# Altium PCB vcsample.pcbdoc
Units mm, origin at the board's own origin, x right, y up, seen from the top; angles counter-clockwise.
Board outline 65.8 x 69.04 mm, 2 copper layers (Top Layer, Bottom Layer); 22 components, 11 nets, 60 pads, 9 vias.
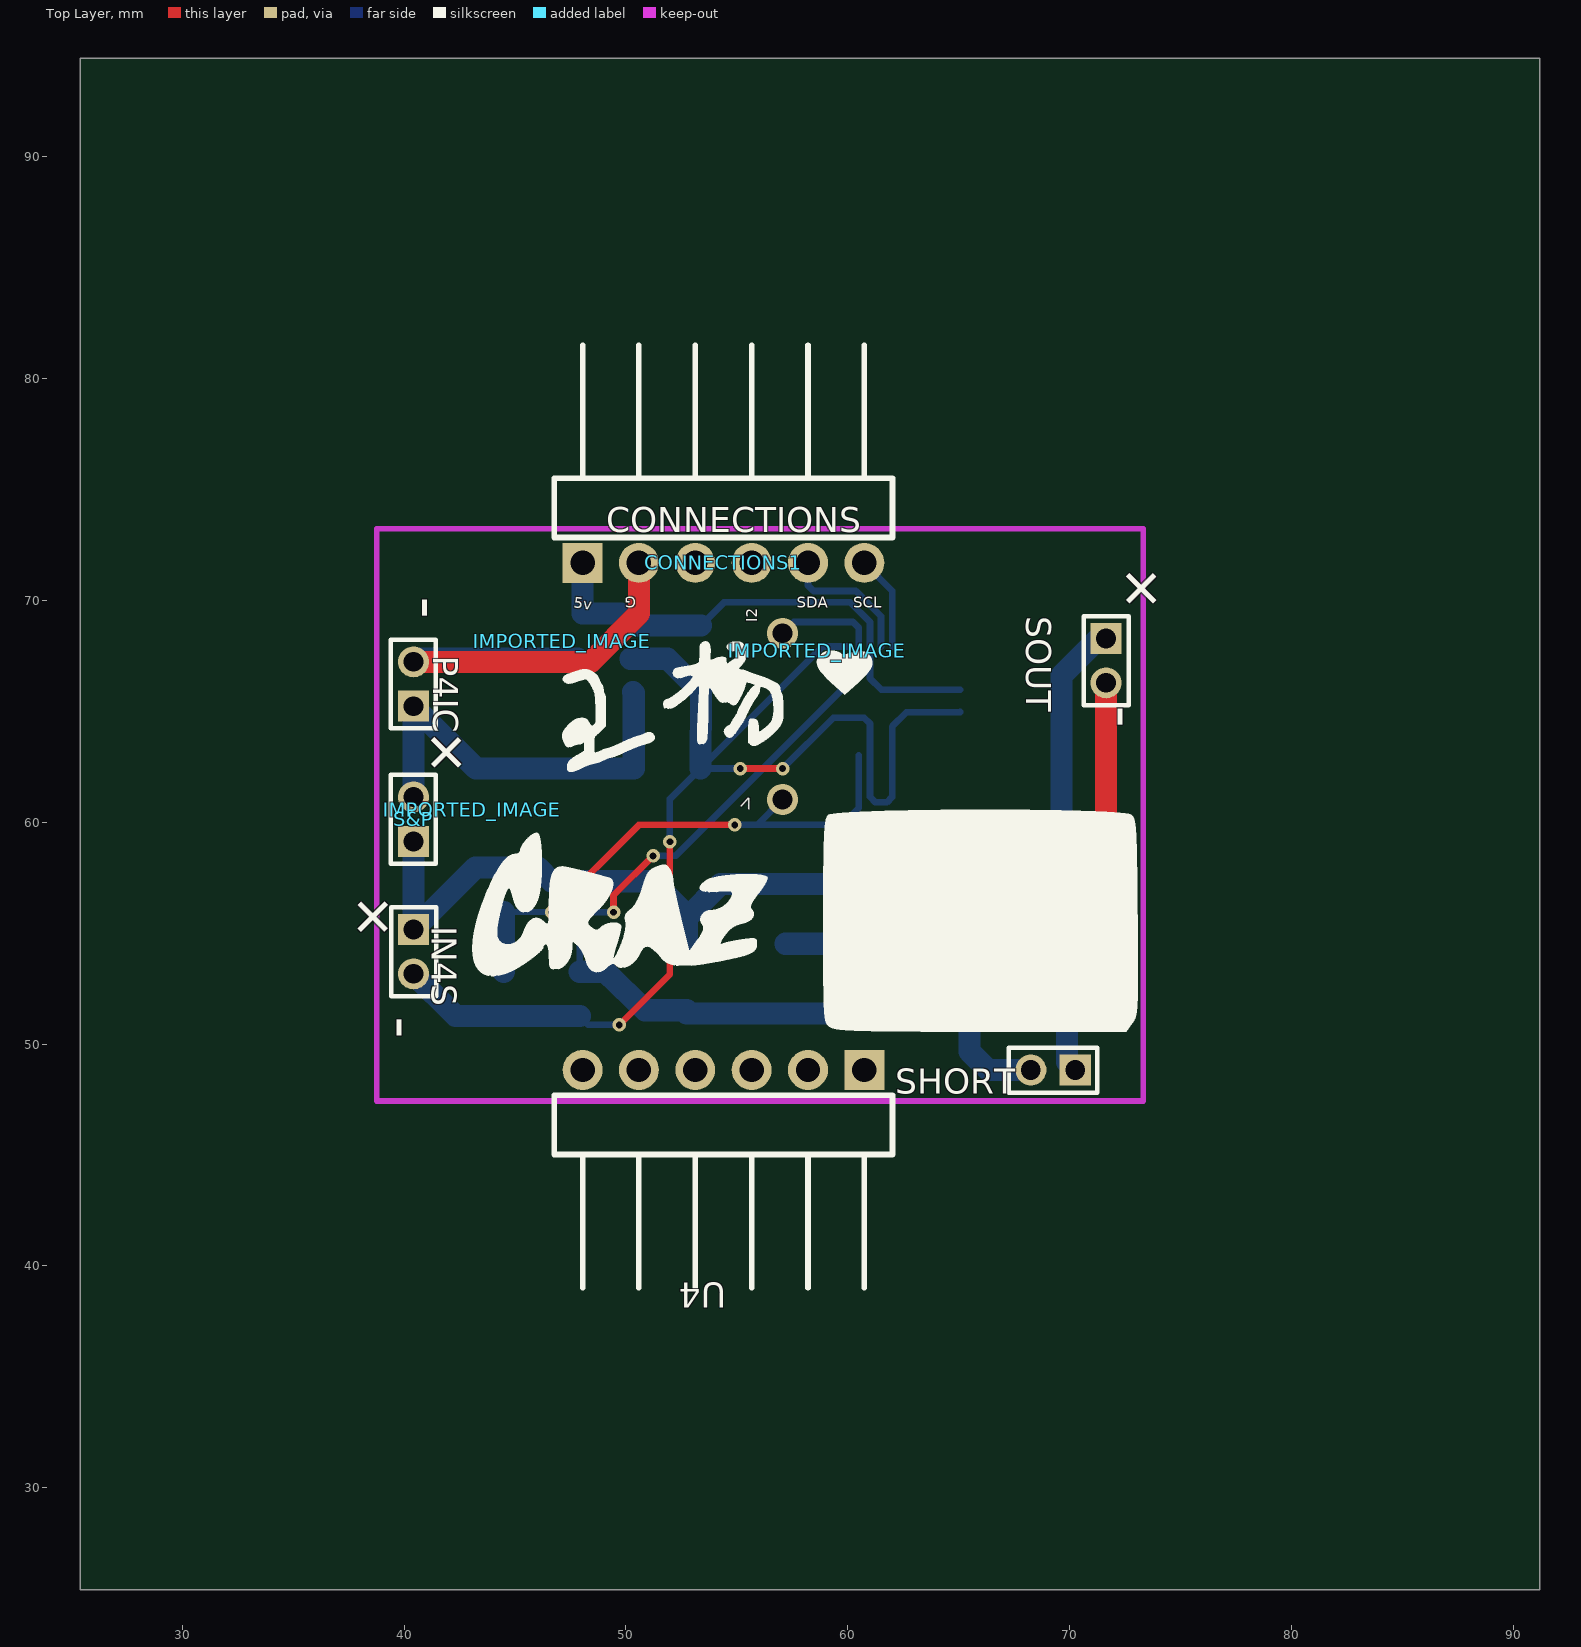
[diagram p0: Top Layer view]
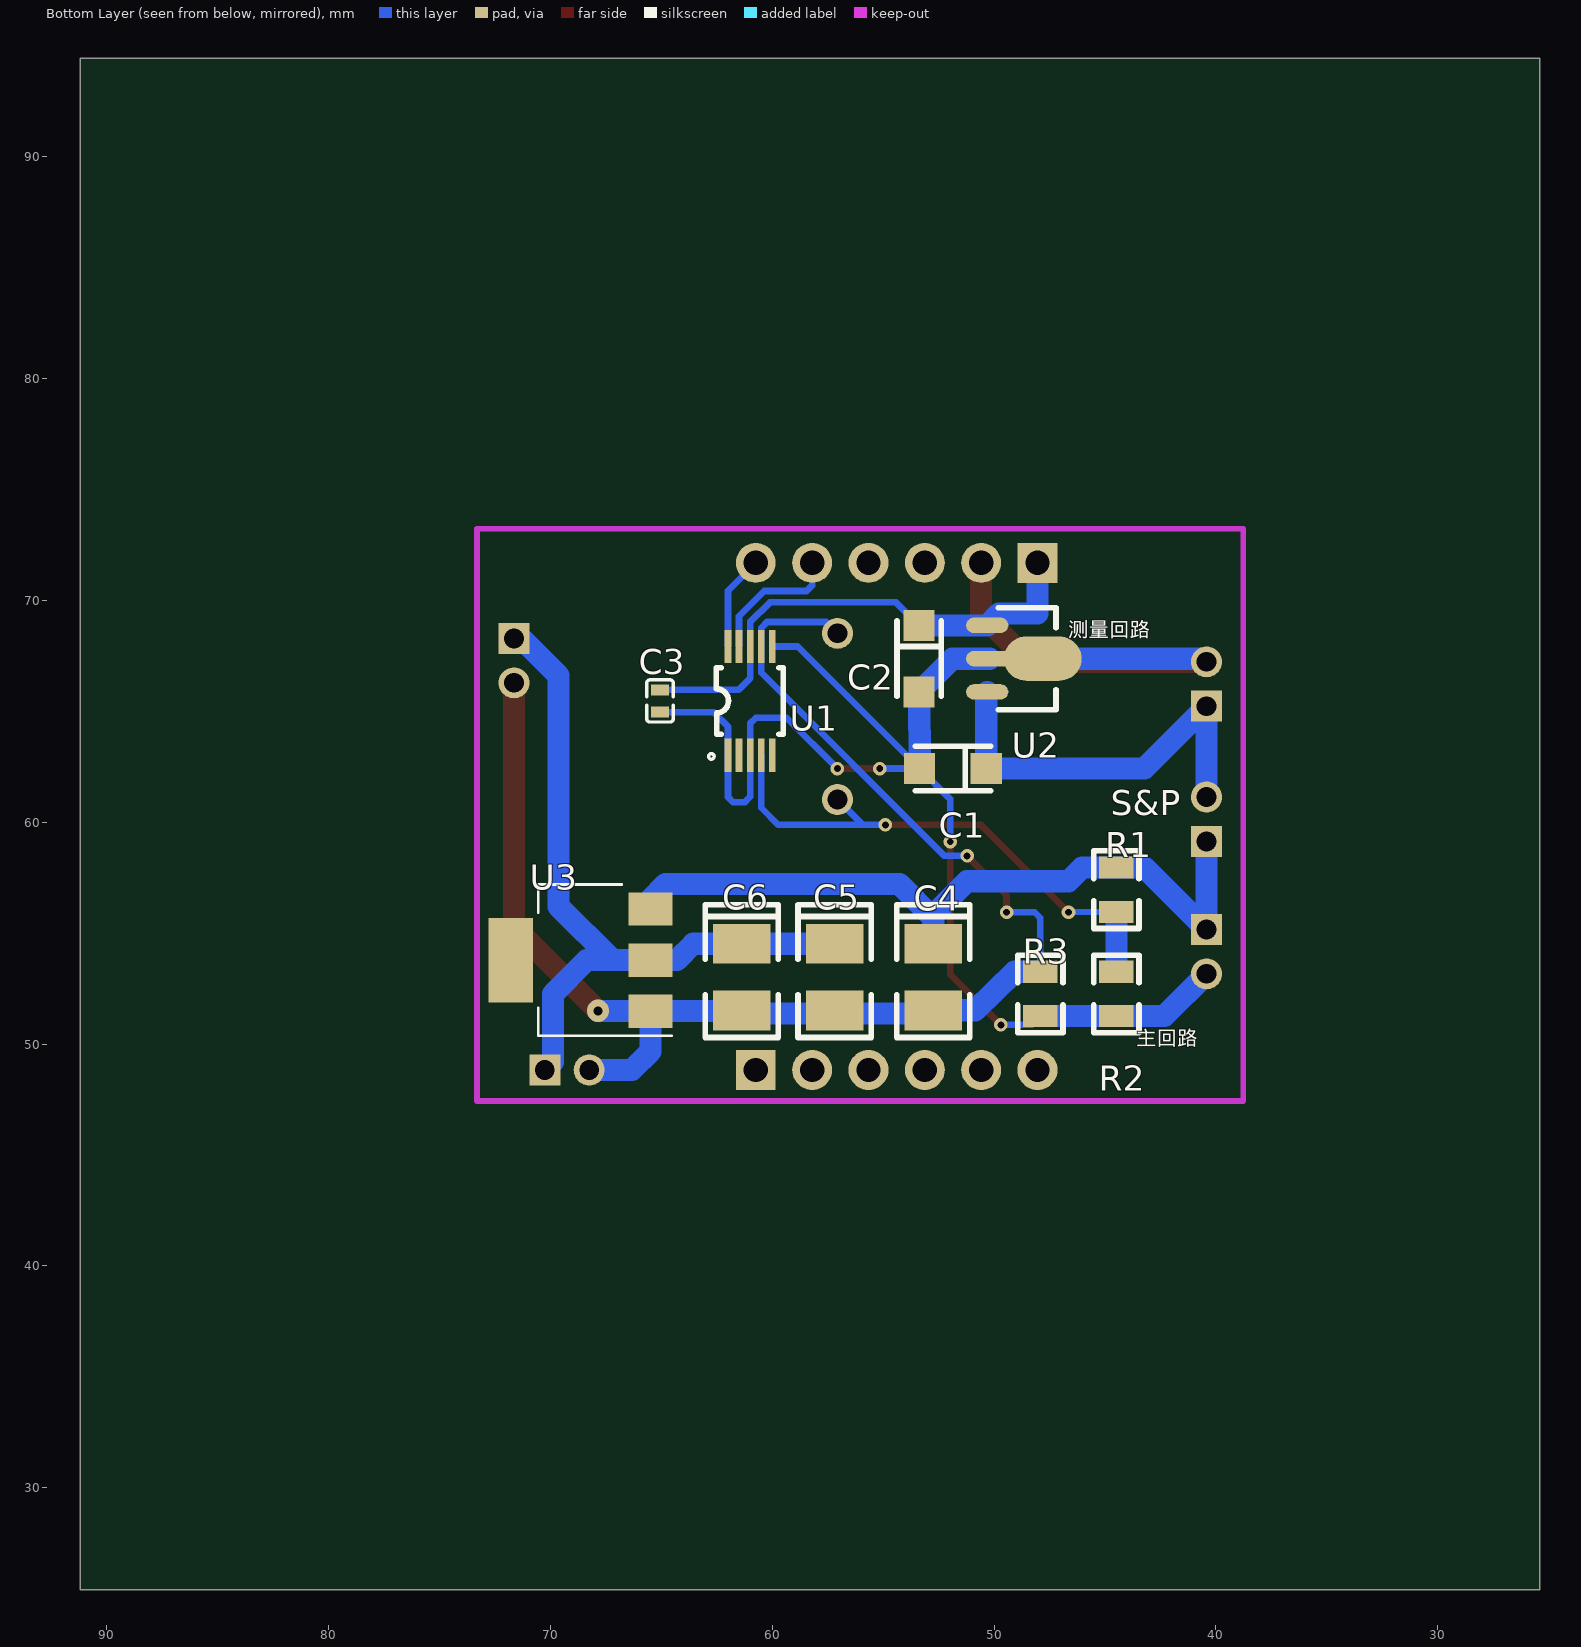
[diagram p1: Bottom Layer view, seen from below]

## Layer stack, top to bottom
Top Layer: signal copper (thickness not stored)
Dielectric: dielectric 0.32, FR-4, Dk 4.8
Bottom Layer: signal copper (thickness not stored)

## Board outline
91.2,25.4 25.4,25.4 25.4,94.441 91.2,94.441

## Components (designator, comment, footprint, x,y, rotation, side; value= is the part's Value field where it differs from the comment)
C1 "1uF" CAP-SMD_L3.2-W1.6-R-RD 51.856,62.42 r0 bottom
C2 "1uF" CAP-SMD_L3.2-W1.6-R-RD 53.38,67.373 r270 bottom
C3 "100pF" C0402 65.064,65.468 r90 bottom
C4 "10uF" CAP-SMD_L3.5-W2.8-R-RD 52.745,53.023 r270 bottom
C5 "10uF" CAP-SMD_L3.5-W2.8-R-RD 57.19,53.023 r270 bottom
C6 "10uF" CAP-SMD_L3.5-W2.8-R-RD 61.381,53.023 r270 bottom
CONNECTIONS1 "connections" HDR-TH_6P-P2.54-H-W10.3 54.396,71.691 r0 top
IMPORTED_IMAGE "IMPORTED_IMAGE" IMPORTED_IMAGE 43.079,60.562 r0 top
IMPORTED_IMAGE "IMPORTED_IMAGE" IMPORTED_IMAGE 47.131,68.153 r0 top
IMPORTED_IMAGE "IMPORTED_IMAGE" IMPORTED_IMAGE 58.625,67.737 r0 top
IN4S "Input" HDR-TH_2P-P2.00-V 40.426,54.165 r270 top
P4IC "Input2" HDR-TH_2P-P2.00-V 40.426,66.23 r90 top
R1 "30kΩ" R0805 44.49,56.959 r90 bottom
R2 "30kΩ" R0805 44.49,52.261 r90 bottom
R3 "0.2" R0805 47.919,52.261 r270 bottom
S&P "Jump" HDR-TH_2P-P2.00-V 40.426,60.134 r90 top
SHORT "ShortCut" HDR-TH_2P-P2.00-V 69.255,48.831 r180 top
SOUT "OUtput" HDR-TH_2P-P2.00-V 71.642,67.285 r270 top
U1 "ADS1115IDGSR" MSOP-10_L3.0-W3.0-P0.50-LS5.0-BL 61,65.468 r0 bottom
U2 "SSP6201P502PR" SOT-89_L4.5-W2.5-P1.50-LS4.2-BR 49.062,67.373 r180 bottom
U3 "AMS1117-5.0" SOT-223 71.795,53.785 r180 bottom
U4 "HDR-TH_6P-P2.54-H-W10.3" HDR-TH_6P-P2.54-H-W10.3 54.396,48.831 r180 top

## Footprints (in the part's own frame and the unit in brackets; to place one, negate y for a bottom-side part, rotate by r counter-clockwise, add the part's x,y. Pads: shape width x height; smd on the part's side, far side on the other; paste and mask are expansions set on the pad)
C0402 [mm]
  rect 0.5x0.8 smd: 1(0.5,0) 2(-0.5,0)
  silkscreen extent -0.95,-0.6 0.95,0.6
CAP-SMD_L3.2-W1.6-R-RD [mm]
  rect 1.4x1.4 smd: 1(-1.5,0) 2(1.5,0)
  silkscreen extent -1.7,-1 1.7,1
CAP-SMD_L3.5-W2.8-R-RD [mm]
  rect 1.8x2.6 smd: 1(-1.501,0) 2(1.501,0)
  silkscreen extent -3.26,-1.65 2.73,1.65
HDR-TH_2P-P2.00-V [mm]
  rect 1.4x1.4 hole 0.889: 1(-1,0)
  round 1.4 hole 0.889: 2(1,0)
  silkscreen extent -2,-1 2.01,1.03
HDR-TH_6P-P2.54-H-W10.3 [mm]
  rect 1.8x1.8 hole 1.1: 1(-6.35,0)
  round 1.8 hole 1.1: 2(-3.81,0) 3(-1.27,0) 4(1.27,0) 5(3.81,0) 6(6.35,0)
  silkscreen extent -7.62,1.14 7.62,9.81
IMPORTED_IMAGE [mm]
  silkscreen extent 0,-10 30,0
MSOP-10_L3.0-W3.0-P0.50-LS5.0-BL [mil]
  rect 12x59.06 smd: 1(39.37,96.5) 2(19.68,96.5) 3(0,96.5) 4(-19.69,96.5) 5(-39.37,96.5) 6(-39.37,-96.5) 7(-19.69,-96.5) 8(0,-96.5) 9(19.68,-96.5) 10(39.37,-96.5)
  silkscreen extent -59,-59 74,103
R0805 [mm]
  rect 1x1.55 smd: 1(1,0) 2(-1,0)
  silkscreen extent -1.75,-1.02 1.75,1.02
SOT-89_L4.5-W2.5-P1.50-LS4.2-BR [mm]
  oval 1.9x0.7 smd: 1(-1.25,1.5) 3(-1.25,-1.5)
  oval 2.1x0.7 smd: 2(-1.151,0)
  oval 3.5x2 smd: 2(1.25,0)
  silkscreen extent -0.75,-2.3 1.85,2.3
SOT-223 [mm]
  rect 2x1.5 smd: 1(6.3,-2.3) 2(6.3,0) 3(6.3,2.3)
  rect 2x3.8 smd: 4(0,0)
  silkscreen extent 1.24,-3.41 7.25,3.41

## Free pads (board coordinates)
  round 1.4 hole 0.889: 1(57.063,61.023) 2(57.063,68.516)

## Via types
v1: diameter 0.61, hole 0.305, Top Layer to Bottom Layer, 8 vias
v2: diameter 1, hole 0.4, Top Layer to Bottom Layer, 1 vias

## Nets (pads, with @x,y where several pads share a name; then routed paths per layer and width w, separated by ;. In a path a pad name is that pad's centre, name@x,y a point inside that pad or via, vN(x,y) a via of type N, cw(c..) or ccw(c..) an arc to the next point about the centre after c; other vN are vias at no path point)
+5V: C2.1 C3.1 CONNECTIONS1.1 U1.8 U2.1 | length 23.1
  Bottom Layer w0.3: C2.1 54.419,69.913 60.111,69.913 61,69.025 U1.8 61,66.484 61.508,65.977 C3.1
  Bottom Layer w1: CONNECTIONS1.1 48.046,69.406 49.78,69.406 U2.1 C2.1
D1: CONNECTIONS1.6 U1.10 | length 4.3
  Bottom Layer w0.3: CONNECTIONS1.6 62,70.438 U1.10
D2: CONNECTIONS1.5 U1.9 | length 6.3
  Bottom Layer w0.3: CONNECTIONS1.5 58.206,70.675 58.46,70.421 60.365,70.421 61.5,69.287 U1.9
D3: CONNECTIONS1.4
D4: CONNECTIONS1.3
ISAMPLE2: C4.2 C5.2 C6.2 pad.2 R3.2 SHORT.2 SOUT.2 U1.7 U3.1 | length 67.7
  Top Layer w0.3: v1(49.443,55.944) 49.443,56.706 v1(51.221,58.483)
  Top Layer w1: v2(67.858,51.498) 71.642,55.283 SOUT.2
  Bottom Layer w0.3: R3.2 47.919,55.689 48.173,55.944 v1(49.443,55.944) ; v1(51.221,58.483) 52.237,58.483 60.5,66.746 U1.7 60.5,68.763 60.238,69.025 57.571,69.025 pad.2
  Bottom Layer w1: R3.2 49.078,53.26 50.863,51.521 C4.2 ; C4.2@52.745,51.371 C6.2@61.381,51.371 ; C6.2 61.418,51.485 U3.1 65.495,49.67 66.334,48.831 SHORT.2 ; U3.1@65.496,51.486 v2(67.858,51.498)
P2_1: C5.1 C6.1 SHORT.1 SOUT.1 U3.2 | length 35.5
  Bottom Layer w1: C5.1 C6.1 63.563,54.524 64.302,53.785 U3.2 ; SHORT.1 69.89,49.196 69.89,52.261 68.366,53.785 U3.2 ; SOUT.1 71.31,68.285 69.636,66.611 69.636,56.197 67.208,53.785 U3.2@65.496,53.785
TD: C1.2 C2.2 C3.2 CONNECTIONS1.2 IN4S.2 P4IC.2 R2.2 R3.1 U1.1 U1.3 U1.6 U2.2 | length 80
  Top Layer w0.3: v1(49.697,50.863) 51.983,53.149 v1(51.983,59.118) ; v1(55.158,62.42) v1(57.063,62.42)
  Top Layer w1: P4IC.2 48.411,67.23 50.586,69.406 CONNECTIONS1.2
  Bottom Layer w0.3: R3.1 48.315,50.863 49.087,50.863 v1(49.697,50.863) ; v1(51.983,59.118) 51.983,61.047 C1.2 ; v1(55.158,62.42) C1.2 ; v1(57.063,62.42) 59.349,64.706 60.746,64.706 61,64.453 U1.3 61,61.151 61.254,60.896 61.762,60.896 62,61.134 U1.1 62.001,64.31 62.651,64.96 C3.2 ; U1.6 58.855,67.919 C1.2
  Bottom Layer w1: IN4S.2 42.331,51.261 R2.2 R3.1 ; P4IC.2 40.569,67.374 U2.2@47.812,67.374 ; U2.2@50.212,67.374 51.878,67.374 C2.2 C1.2@53.357,62.42
TV: C4.1 IN4S.1 R1.1 S&P.1 U3.3 | length 34.9
  Bottom Layer w1: S&P.1 IN4S.1 43.22,57.959 R1.1 46.03,57.959 46.649,57.34 51.221,57.34 52.745,55.816 C4.1 52.745,55.689 54.269,57.213 64.81,57.213 65.495,56.528 U3.3
VCC: C1.1 P4IC.1 S&P.2 U2.3 | length 18.7
  Bottom Layer w1: S&P.2 P4IC.1 43.236,62.42 C1.1 50.356,65.829 U2.3
VSAMPLE: pad.1 R1.2 R2.1 U1.4 | length 25.7
  Top Layer w0.3: v1(46.649,55.944) 50.586,59.88 v1(54.904,59.88)
  Bottom Layer w0.3: R1.2 v1(46.649,55.944) ; pad.1 55.92,59.88 v1(54.904,59.88) 59.73,59.88 60.5,60.65 U1.4
  Bottom Layer w1: R2.1 R1.2
pads on no net: U1.2 U1.5 U3.4 U4.1 U4.2 U4.3 U4.4 U4.5 U4.6

## Silkscreen, mask and mechanical layers (free items; w line width, h text height)
Top Overlay:
  text "CONNECTIONS" at 49.123,73.068 h1.14
  text "+" at 71.813,70.757 h2.03 r315
  text "-" at 40.172,70.168 h2.03 r270
  text "G" at 50.459,70.163 h0.5 r180
  text "5v" at 47.634,69.665 h0.5 r353
  text "SDA" at 57.698,69.664 h0.5
  text "SCL" at 60.238,69.664 h0.5
  text "I2" at 55.916,69.025 h0.5 r90
  text "-" at 71.515,65.253 h2.03 r270
  text "+" at 40.469,63.353 h2.03 r315
  text "V" at 55.755,61.003 h0.5 r159
  text "+" at 38.818,57.17 h2.03 r225
  text "-" at 40.553,50.228 h2.03 r90
Bottom Overlay:
  text "测量回路" at 46.649,68.135 h1.14
  text "主回路" at 43.601,49.721 h1.14